# Altium PCB PCB1.PcbDoc
Units mm, origin at the board's own origin, x right, y up, seen from the top; angles counter-clockwise.
Board outline 40 x 25 mm, 4 copper layers (Top Layer 1, Top Layer, Bottom Layer, Bottom Layer 1), stack 1.502 mm thick; 33 components, 45 nets, 230 pads, 132 vias.
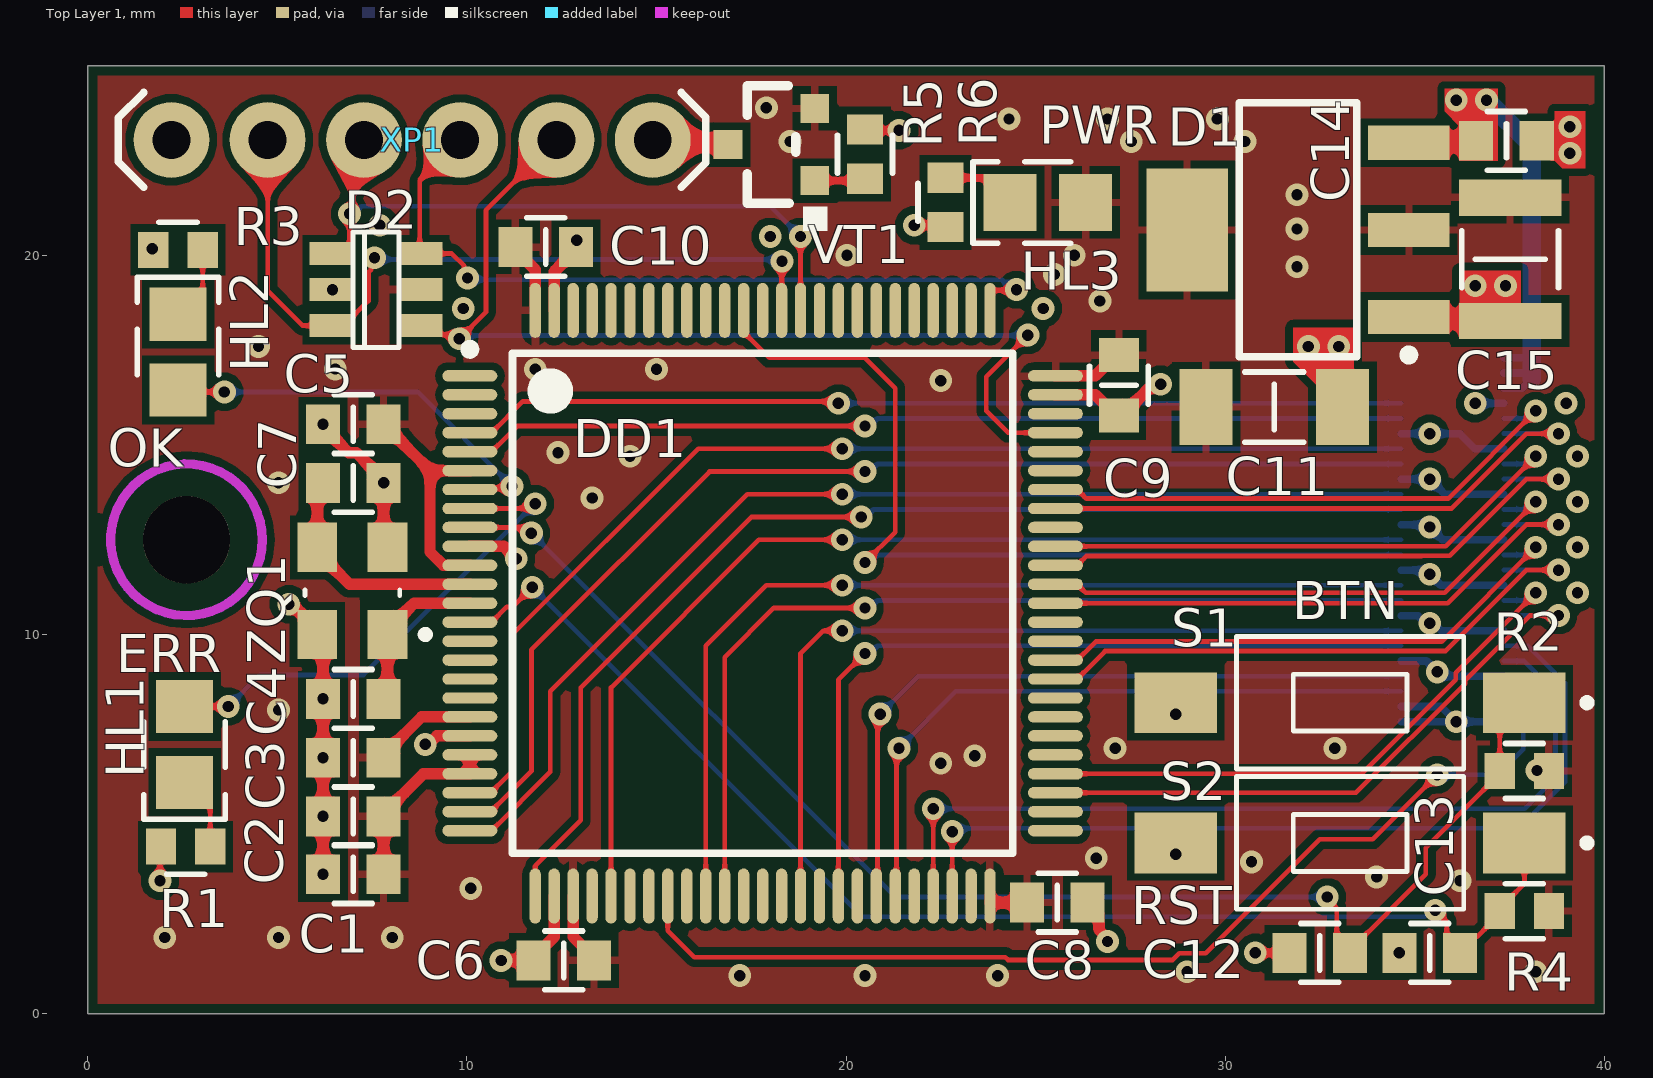
[diagram p0: Top Layer 1 view]
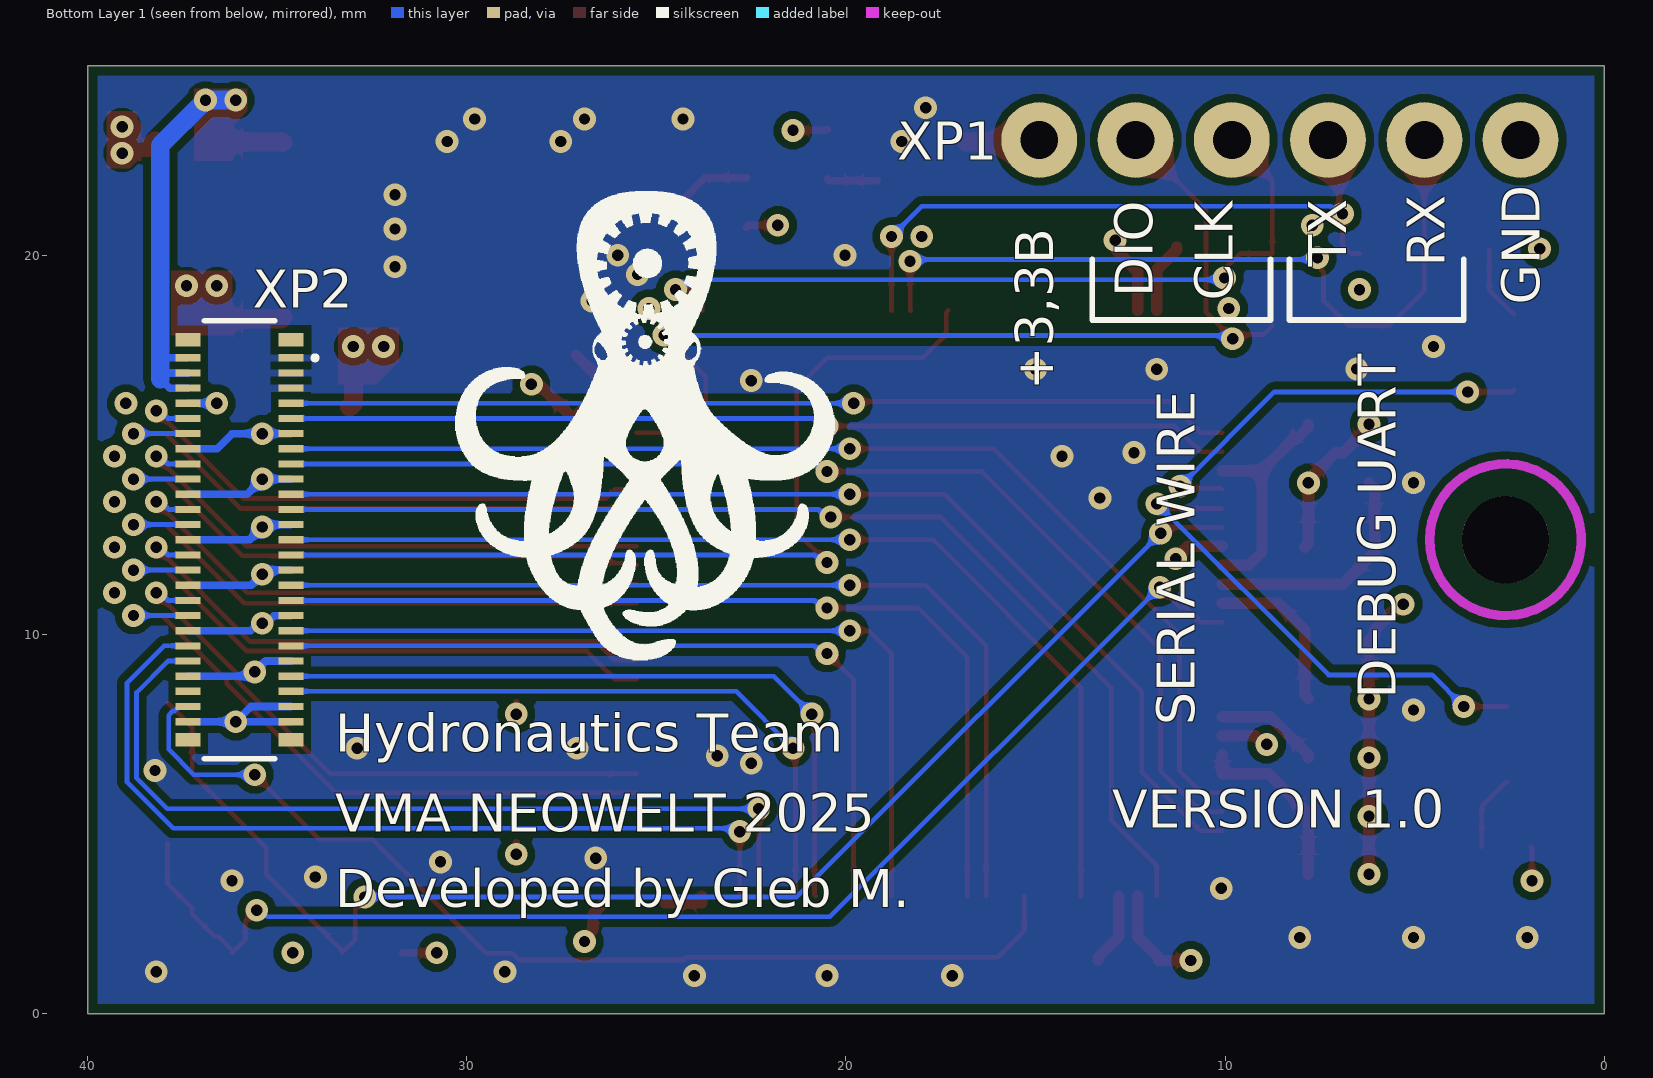
[diagram p1: Bottom Layer 1 view, seen from below]
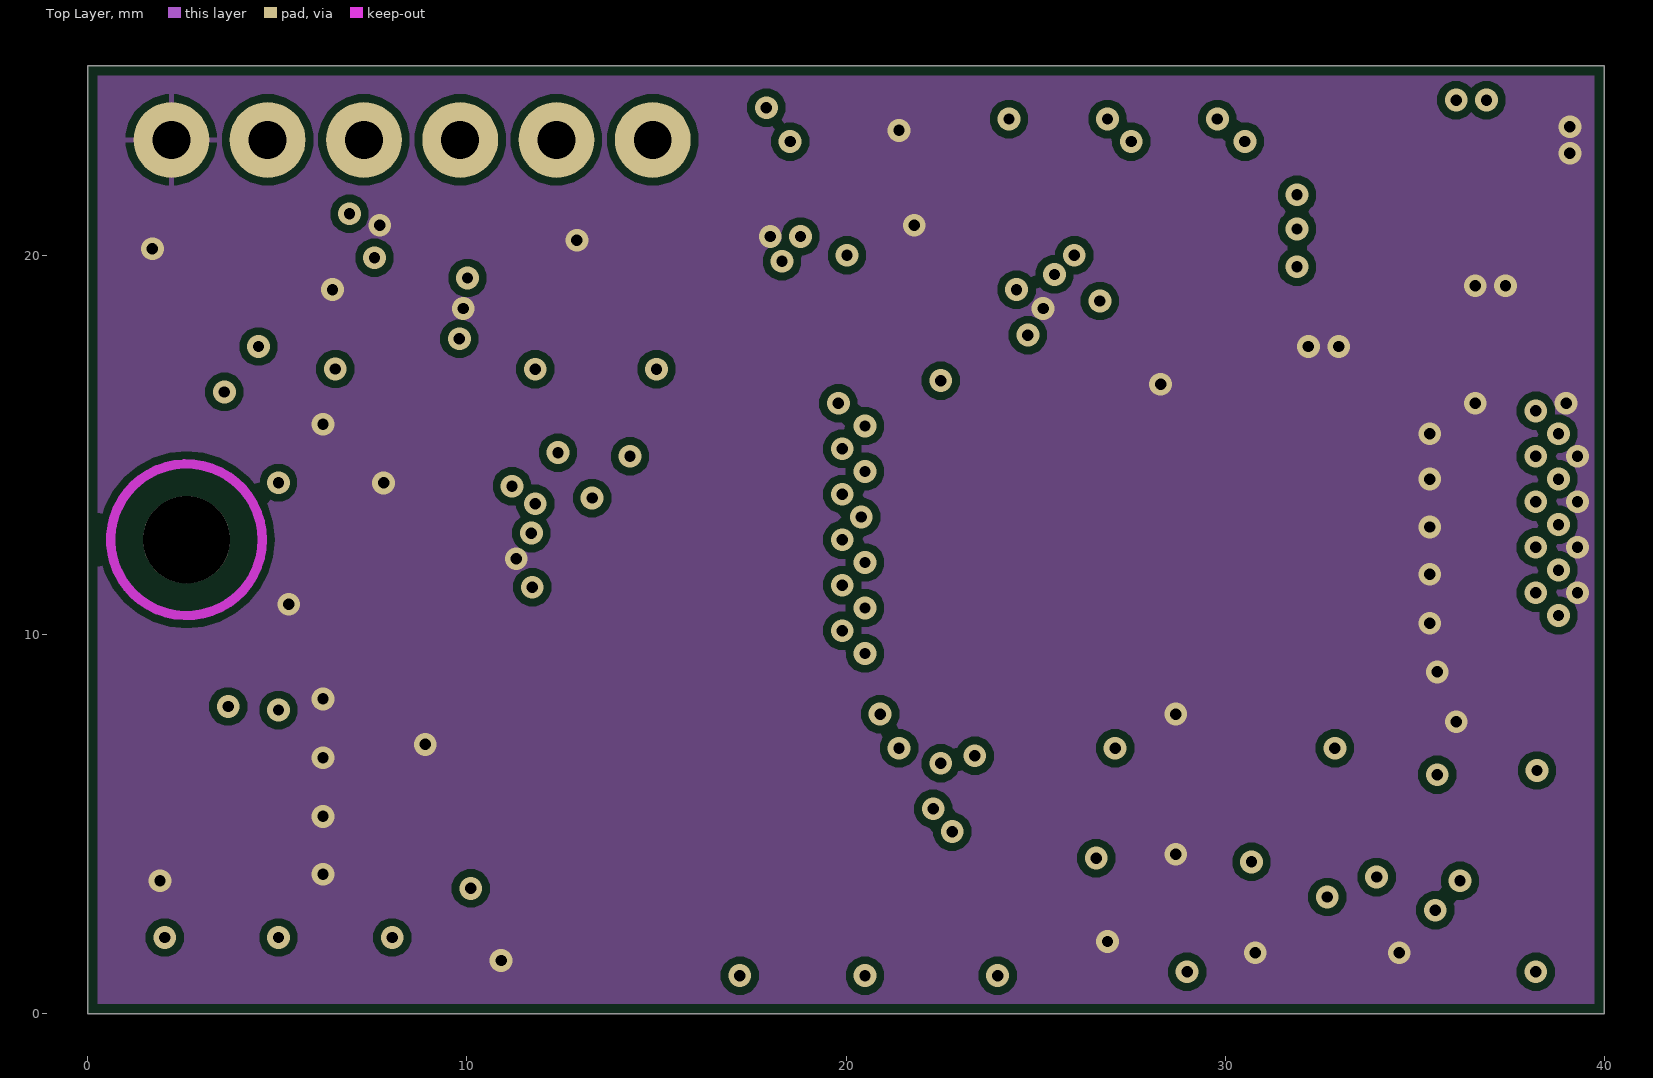
[diagram p2: Top Layer]
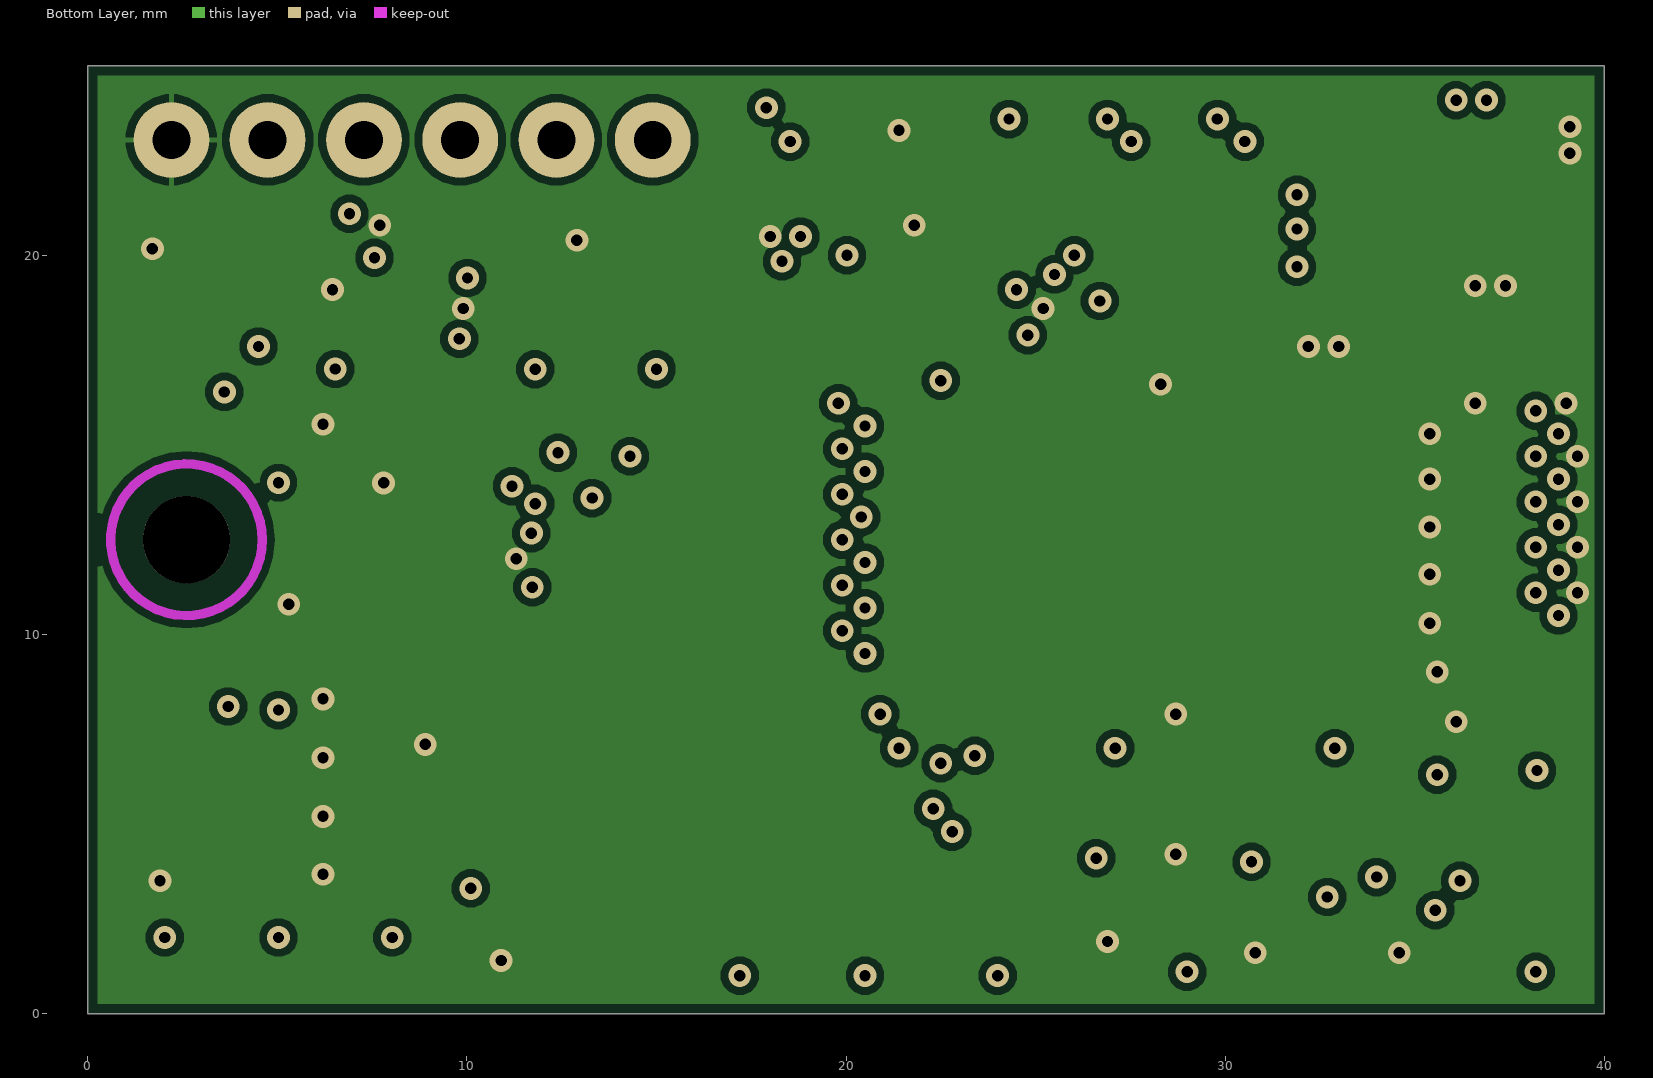
[diagram p3: Bottom Layer]

## Layer stack, top to bottom
Top Solder: solder mask 0.0102, Solder Resist, Dk 3.5
Top Layer 1: signal copper 0.018
Dielectric 2: prepreg 0.115, FR4, Dk 4.2
Top Layer: signal copper 0.018
Dielectric 1: core 1.2, FR4, Dk 4.6
Bottom Layer: signal copper 0.018
Dielectric 3: prepreg 0.115, FR4, Dk 4.2
Bottom Layer 1: signal copper 0.018
Bottom Solder: solder mask 0.0102, Solder Resist, Dk 3.5

## Board outline
0,0 40,0 40,25 0,25

## Design rules (kind name [scope] priority, off if disabled: settings)
AcuteAngle [All] p1: minimum=3.50000000000000E+0001 checktracksonly=FALSE
BoardOutlineClearance "BoardOutlineClearance 1" [All] p1: gap=0.25 ignorepadtopadclearanceinfootprint=FALSE except(0: Arc-SplitContinuation Track-SplitContinuation SMDPad-SplitContinuation THPad-SplitContinuation Via-SplitContinuation Fill-SplitContinuation Poly-SplitContinuation Region-SplitContinuation Text-SplitContinuation) // Milling
BoardOutlineClearance "BoardOutlineClearance 2" [All] p2: gap=0.4 ignorepadtopadclearanceinfootprint=FALSE except(0: Arc-SplitContinuation Track-SplitContinuation SMDPad-SplitContinuation THPad-SplitContinuation Via-SplitContinuation Fill-SplitContinuation Poly-SplitContinuation Region-SplitContinuation Text-SplitContinuation) // V-Cut
Clearance "Clearance-1 1/2 Oz" [All] p1: gap=0.125 ignorepadtopadclearanceinfootprint=FALSE except(0.2: Arc-Fill Arc-Poly Track-Fill Track-Poly SMDPad-SMDPad SMDPad-Fill SMDPad-Poly THPad-Fill THPad-Poly Via-Fill Via-Poly Fill-Fill Fill-Poly Poly-Poly Poly-Region Poly-Text; 0.25: Arc-Hole Track-Hole SMDPad-Hole THPad-Hole Via-Hole Fill-Hole Poly-Hole Region-Hole Text-Hole) // Standart
DiffPairsRouting "DiffPairsRouting 1/2 Oz" [All] p1: maxlimit=0.2 minlimit=0.125 mostfreqgap=0.125 toplayer_minwidth=0.125 toplayer_maxwidth=0.3 toplayer_prefwidth=0.2 midlayer1_minwidth=0.125 midlayer1_maxwidth=0.3 midlayer1_prefwidth=0.2 midlayer2_minwidth=0.125 midlayer2_maxwidth=0.3 midlayer2_prefwidth=0.2 bottomlayer_minwidth=0.125 bottomlayer_maxwidth=0.3 bottomlayer_prefwidth=0.2 maxuncoupledlength=12.7
HoleSize "Minimum HoleSize" [IsPad] p1: absolutevalues=TRUE maxlimit=5.9 minlimit=0.6 maxpercent=80.000 minpercent=20.000
HoleSize "Minimum HoleSize VIA 1" [IsVia] p2: absolutevalues=TRUE maxlimit=5.9 minlimit=0.3 maxpercent=80.000 minpercent=20.000 // Standart
HoleToHoleClearance Hole2HoleClearance [All] p1: gap=0.25 allowstackedmicrovias=FALSE
MinimumAnnularRing "Minimum AR VIA Standart" [IsVia] p1: minimumring=0.15
MinimumAnnularRing "Minimum AR PAD Standart" [IsPAD] p2: minimumring=0.2
MinimumSolderMaskSliver "SolderMask Bridge Standart" [All] p1: minsoldermaskwidth=0.149 // All Masks
PlaneClearance "PlaneClearance-1 1/2 Oz" [All] p1: clearance=0.2 // Standart
PlaneConnect "TermalConnect-1 1/2 Oz" [All] p1: pad.planeconnectstyle=Relief pad.reliefexpansion=0.2 pad.reliefentries=4 pad.reliefconductorwidth=0.2 pad.reliefairgap=0.2 via.planeconnectstyle=Direct via.reliefexpansion=0.2 via.reliefentries=4 via.reliefconductorwidth=0.2 via.reliefairgap=0.2 // Standart
PolygonConnect "PolygonConnect-1 1/2 Oz" [All] p1: thpad.connectstyle=Relief thpad.reliefconductorwidth=0.15 thpad.reliefentries=4 thpad.polygonreliefangle="90 Angle" thpad.airgapwidth=0.2 smdpad.connectstyle=Relief smdpad.reliefconductorwidth=0.2 smdpad.reliefentries=4 smdpad.polygonreliefangle="90 Angle" smdpad.airgapwidth=0.2 via.connectstyle=Direct via.reliefconductorwidth=0.254 via.reliefentries=4 via.polygonreliefangle="90 Angle" via.airgapwidth=0.254 // Standart
RoutingCorners [All] p1 off: cornerstyle=45-Degree minsetback=2.54 maxsetback=2.54
RoutingVias [All] p1: holewidth=0.3 width=0.6 viastyle="Through Hole" minholewidth=0.3 minwidth=0.6 maxholewidth=0.3 maxwidth=0.6
SilkToSilkClearance Silk2SilkClearance [All] p1 off: silktosilkclearance=0.15
SilkToSolderMaskClearance Silk2SolderMaskClearance [IsPad] p1 off: minsilkscreentomaskgap=0.15 clearancetoexposedcopper=TRUE
SolderMaskExpansion [IsVia] p1: expansion=0.102 istentingtop=TRUE
SolderMaskExpansion "SolderMaskExpansion LDI" [All] p2: expansion=0.025 istentingtop=FALSE // Advance
SupplyNets "Schematic Supply Nets_2" [InNet('+5В')] p1: voltage=0.000
SupplyNets "Schematic Supply Nets_1" [InNet('GND')] p2: voltage=0.000
SupplyNets "Schematic Supply Nets" [InNet('+3,3В')] p3: voltage=0.000
UnRoutedNet [All] p1: checkbadconnections=TRUE
Width "Width 1/2 Oz" [All] p1: maxlimit=0.5 minlimit=0.125 preferedwidth=0.2 checkconnectedcopper=TRUE
20 further rules are at their usual default settings.

## Classes and differential pairs
net class TIM12_CH[1..2]: TIM12_CH1 TIM12_CH2
net class TIM9_CH[1..2]: TIM9_CH1 TIM9_CH2
net class TIM8_CH[1..4]: TIM8_CH1 TIM8_CH2 TIM8_CH3 TIM8_CH4
net class TIM5_CH[1..4]: TIM5_CH1 TIM5_CH2 TIM5_CH3 TIM5_CH4
net class TIM3_CH[3..4]: TIM3_CH3 TIM3_CH4
net class TIM4_CH[1..2]: TIM4_CH1 TIM4_CH2
net class TIM2_CH[1..4]: TIM2_CH1 TIM2_CH2 TIM2_CH3 TIM2_CH4
net class TIM1_CH[1..4]: TIM1_CH1 TIM1_CH2 TIM1_CH3 TIM1_CH4
component class Connectors: 2 C14 C15 D1 D2 HL3 R5 R6 VT1 XP1 XP2
component class MCU: 2 C1 C2 C3 C4 C5 C6 C7 C8 C9 C10 C11 C12 C13 DD1 HL1 HL2 R1 R2 R3 R4 S1 S2 ZQ1

## Components (designator, comment, footprint, x,y, rotation, side; value= is the part's Value field where it differs from the comment)
C1 "Capacitor" 0603C 7,3.675 r0 top value="1 мк"
C2 "Capacitor" 0603C 7,5.2 r0 top value="0,1 мк"
C3 "Capacitor" 0603C 7,6.75 r0 top value="0,1 мк"
C4 "Capacitor" 0603C 7,8.3 r0 top value="12 п"
C5 "Capacitor" 0603C 7,15.55 r0 top value="0,1 мк"
C6 "Capacitor" 0603C 12.55,1.4 r0 top value="0,1 мк"
C7 "Capacitor" 0603C 7,14 r180 top value="12 п"
C8 "Capacitor" 0603C 25.575,2.925 r180 top value="0,1 мк"
C9 "Capacitor" 0603C 27.2,16.575 r90 top value="0,1 мк"
C10 "Capacitor" 0603C 12.075,20.225 r180 top value="0,1 мк"
C11 "Capacitor" 1206C 31.3,16 r180 top value="4,7 мк"
C12 "Capacitor" 0603C 32.5,1.6 r0 top value="0,1 мк"
C13 "Capacitor" 0603C 35.4,1.6 r0 top value="0,1 мк"
C14 "Capacitor" 0603C 37.425,23.025 r180 top value="0,1 мк"
C15 "Capacitor" 1210C 37.525,19.9 r90 top value="10 мк"
D1 "LD1117S33CTR" SOT223 31.925,20.675 r180 top
D2 "USBLC6-4" SOT23-6 7.6,19.1 r270 top
DD1 "STM32F407VGT6" LQFP100 17.8,10.825 r0 top
HL1 "LED" 0805D 2.55,7.1 r270 top
HL2 "LED" 0805D 2.375,17.45 r90 top
HL3 "LED" 0805D 25.325,21.4 r180 top
R1 "Resistor" 0603R 2.575,4.4 r0 top value="1,0 к"
R2 "Resistor" 0603R 37.9,6.4 r0 top value="10 к"
R3 "Resistor" 0603R 2.375,20.15 r0 top value="1,0 к"
R4 "Resistor" 0603R 37.9,2.7 r0 top value="10 к"
R5 "Resistor" 0603R 20.5,22.675 r270 top value="10 к"
R6 "Resistor" 0603R 22.625,21.4 r90 top value="1,0 к"
S1 "Tact_button" Button_SMD_10mm 33.3,8.2 r180 top
S2 "Tact_button" Button_SMD_10mm 33.3,4.5 r180 top
VT1 "AO3401A" SOT23-3 19.175,21.975 r180 top
XP1 "PLS-6" PLS6 14.9,23.05 r270 top
XP2 "DF40C-50DP" DF40C-50DP 36,12.5 r270 bottom
ZQ1 "XTAL_GND" QSMD3.2x2.5 7.9,10 r180 top value="8 МГц"

## Footprints (in the part's own frame and the unit in brackets; to place one, negate y for a bottom-side part, rotate by r counter-clockwise, add the part's x,y. Pads: shape width x height; smd on the part's side, far side on the other; paste and mask are expansions set on the pad)
0603C [mm] "Chip Resistor, 2-Leads, Body 1,40x0,80mm, IPC Medium Density"
  rect 0.9x1.05 smd: 1(-0.8,0) 2(0.8,0)
  silkscreen extent -0.5,-0.77 0.5,0.77, body extent -0.85,-0.45 0.85,0.45, height 0.9
0603R [mm] "Chip Resistor, 2-Leads, Body 1.60x0.85mm, IPC Medium Density"
  rect 0.8x0.95 smd: 1(-0.65,0) 2(0.65,0)
  silkscreen extent -0.5,-0.72 0.5,0.72, body extent -0.87,-0.47 0.88,0.48, height 0.9
0805D [mm]
  rect 1.4x1.5 smd: 1(-1,0) 2(1,0)
  silkscreen extent -0.6,-1.07 1.97,1.07, body extent -1.07,-0.7 1.07,0.7, height 0.7
1206C [mm]
  rect 1.4x2 smd paste+0: 1(-1.8,0) 2(1.8,0)
  silkscreen extent -0.77,-0.92 0.77,0.92, body extent -1.6,-0.74 1.6,0.86, height 1.59
1210C [mm]
  rect 0.954x2.706 smd paste+0: 1(-1.625,0) 2(1.625,0)
  silkscreen extent -0.75,-1.28 0.75,1.28, body extent -2.35,-1.6 2.35,1.6, height 0.25
Button_SMD_10mm [mm]
  rect 2.18x1.6 smd: 1(-4.6,0) 2(4.6,0)
  silkscreen extent -6.35,-1.75 3,1.75, body extent -3.4,-1.75 3.4,1.75, height 5.2
DF40C-50DP [mm]
  rect 0.19x0.66 smd: 1(-4.8,1.355) 2(-4.8,-1.355) 3(-4.4,1.355) 4(-4.4,-1.355) 5(-4,1.355) 6(-4,-1.355) 7(-3.6,1.355) 8(-3.6,-1.355) 9(-3.2,1.355) 10(-3.2,-1.355) 11(-2.8,1.355) 12(-2.8,-1.355) 13(-2.4,1.355) 14(-2.4,-1.355) 15(-2,1.355) 16(-2,-1.355) 17(-1.6,1.355) 18(-1.6,-1.355) 19(-1.2,1.355) 20(-1.2,-1.355) 21(-0.8,1.355) 22(-0.8,-1.355) 23(-0.4,1.355) 24(-0.4,-1.355) 25(0,1.355) 26(0,-1.355) 27(0.4,1.355) 28(0.4,-1.355) 29(0.8,1.355) 30(0.8,-1.355) 31(1.2,1.355) 32(1.2,-1.355) 33(1.6,1.355) 34(1.6,-1.355) 35(2,1.355) 36(2,-1.355) 37(2.4,1.355) 38(2.4,-1.355) 39(2.8,1.355) 40(2.8,-1.355) 41(3.2,1.355) 42(3.2,-1.355) 43(3.6,1.355) 44(3.6,-1.355) 45(4,1.355) 46(4,-1.355) 47(4.4,1.355) 48(4.4,-1.355) 49(4.8,1.355) 50(4.8,-1.355)
  rect 0.35x0.66 smd: M1(-5.28,1.355) M2(5.28,1.355) M3(5.28,-1.355) M4(-5.28,-1.355)
  silkscreen extent -5.77,-0.92 5.77,2.05, body extent -5.76,-1.49 5.76,1.49, height 1.14
LQFP100 [mm] "TSQFP, 100-Leads, Body 14,00x14,00mm, Pitch 0,50mm, IPC Medium Density"
  oval 1.45x0.3 smd: 1(-7.725,6) 2(-7.725,5.5) 3(-7.725,5) 4(-7.725,4.5) 5(-7.725,4) 6(-7.725,3.5) 7(-7.725,3) 8(-7.725,2.5) 9(-7.725,2) 10(-7.725,1.5) 11(-7.725,1) 12(-7.725,0.5) 13(-7.725,0) 14(-7.725,-0.5) 15(-7.725,-1) 16(-7.725,-1.5) 17(-7.725,-2) 18(-7.725,-2.5) 19(-7.725,-3) 20(-7.725,-3.5) 21(-7.725,-4) 22(-7.725,-4.5) 23(-7.725,-5) 24(-7.725,-5.5) 25(-7.725,-6) 51(7.725,-6) 52(7.725,-5.5) 53(7.725,-5) 54(7.725,-4.5) 55(7.725,-4) 56(7.725,-3.5) 57(7.725,-3) 58(7.725,-2.5) 59(7.725,-2) 60(7.725,-1.5) 61(7.725,-1) 62(7.725,-0.5) 63(7.725,0) 64(7.725,0.5) 65(7.725,1) 66(7.725,1.5) 67(7.725,2) 68(7.725,2.5) 69(7.725,3) 70(7.725,3.5) 71(7.725,4) 72(7.725,4.5) 73(7.725,5) 74(7.725,5.5) 75(7.725,6)
  oval 0.3x1.45 smd: 26(-6,-7.725) 27(-5.5,-7.725) 28(-5,-7.725) 29(-4.5,-7.725) 30(-4,-7.725) 31(-3.5,-7.725) 32(-3,-7.725) 33(-2.5,-7.725) 34(-2,-7.725) 35(-1.5,-7.725) 36(-1,-7.725) 37(-0.5,-7.725) 38(0,-7.725) 39(0.5,-7.725) 40(1,-7.725) 41(1.5,-7.725) 42(2,-7.725) 43(2.5,-7.725) 44(3,-7.725) 45(3.5,-7.725) 46(4,-7.725) 47(4.5,-7.725) 48(5,-7.725) 49(5.5,-7.725) 50(6,-7.725) 76(6,7.725) 77(5.5,7.725) 78(5,7.725) 79(4.5,7.725) 80(4,7.725) 81(3.5,7.725) 82(3,7.725) 83(2.5,7.725) 84(2,7.725) 85(1.5,7.725) 86(1,7.725) 87(0.5,7.725) 88(0,7.725) 89(-0.5,7.725) 90(-1,7.725) 91(-1.5,7.725) 92(-2,7.725) 93(-2.5,7.725) 94(-3,7.725) 95(-3.5,7.725) 96(-4,7.725) 97(-4.5,7.725) 98(-5,7.725) 99(-5.5,7.725) 100(-6,7.725)
  silkscreen extent -7.85,-6.6 6.6,6.82, body extent -8,-8 8,8, height 1.6
PLS6 [mm]
  round 2 hole 1: 1(0,0) 2(0,-2.54) 3(0,-5.08) 4(0,-7.62) 5(0,-10.16) 6(0,-12.7)
  silkscreen extent -1.25,-14.1 1.25,1.4, body extent -1.27,-13.97 1.27,1.27, height 8.44
QSMD3.2x2.5 [mm] "Кварцевый резонатор"
  rect 1.05x1.3 smd: 1(0,0) 2(1.85,-2.3) 3(0,-2.3) 3(1.85,0)
  silkscreen extent -1.1,-1.18 2.18,0.1, body extent -0.32,-2.75 2.18,0.45, height 0.8
SOT23-3 [mil]
  rect 30x30 smd: 1(0,0) 2(0,-75) 3(90,-37.5)
  silkscreen extent -13,-98 70,52, body extent -4,-97 94,21, height 41
SOT23-6 [mm]
  rect 0.6x1.2 smd: 1(-0.95,-1.15) 2(0,-1.15) 3(0.95,-1.15) 4(0.95,1.15) 5(0,1.15) 6(-0.95,1.15)
  silkscreen extent -1.52,-0.61 1.52,0.61, body extent -1.46,-1.4 1.46,1.4, height 1.4
SOT223 [mm] "SOT223, ld1117"
  rect 2.15x0.9 smd: 1(-2.925,2.3) 2(-2.925,0) 3(-2.925,-2.3)
  rect 2.15x3.25 smd: 2(2.925,0)
  silkscreen extent -3.05,-3.35 1.55,3.42, body extent -3.56,-3.3 3.51,3.2, height 1.6

## Part data
C1: library part Capacitor_1u_10_50V_X7R_0603C, "Конденсатор", Capacity (nF)=1000, Dielectric=X7R, Tolerance=0,1, Voltage (V)=50, Library Path2=Schematic\Capacitor.SchLib, Part Number=Capacitor_1u_10_50V_X7R_0603C
C2 C3 C5 C6 C8 C9 C10 C12 C13 C14: library part Capacitor_0,1u_10_50V_X7R_0603C, "Конденсатор", Capacity (nF)=100, Dielectric=X7R, Tolerance=0,1, Voltage (V)=50, Library Path2=Schematic\Capacitor.SchLib, Part Number=Capacitor_0,1u_10_50V_X7R_0603C
C4 C7: library part "0,1 мк", "Конденсатор 12п", Part Number=Capacitor
C11: library part Capacitor_4,7u_10_50V_X7R_1206C, "Конденсатор", Capacity (nF)=4700, Dielectric=X7R, Tolerance=0,1, Voltage (V)=50, Library Path2=Schematic\Capacitor.SchLib, Part Number=Capacitor_4,7u_10_50V_X7R_1206C
C15: library part Capacitor_10u_10_35V_X7R_1210C, "Конденсатор", Capacity (nF)=10000, Dielectric=X7R, Tolerance=0,1, Voltage (V)=35, Library Path2=Schematic\Capacitor.SchLib, Part Number=Capacitor_10u_10_35V_X7R_1210C
D1: "Линейный стабилизатор напряжения", Part Number=LD1117S33CTR
D2: "Сборка защитных диодов для USB", ComponentLink1Description=Shop, ComponentLink1URL=https://www.chipdip.ru/product0/8001780508, Part Number=USBLC6-4
DD1: "Микроконтроллер", Part Number=STM32F407VGT6
HL1 HL3: "Светодиод", Color=Красный, Part Number=LED
HL2: "Светодиод", Color=Зеленый, Part Number=LED
R1 R3 R6: library part Resistor_1.0k_1_0603, "Резистор номиналом 1,0 кОм и точностью 1%", Tolerance=1%, Part Number=Resistor_1.0k_1_0603
R2 R4 R5: library part Resistor_10k_1_0603, "Резистор номиналом 10 кОм и точностью 1%", Tolerance=1%, Part Number=Resistor_10k_1_0603
S1 S2: "Тактовая кнопка", Part Number=Tact_button
VT1: "P-канальный MOSFET", Part Number=AO3401A
XP1: "Гребенка 6 пинов", Value1=+3,3В, Value2=SWDIO, Value3=SWCLOCK, Value4=UART_TX, Value5=UART_RX, Value6=GND, Part Number=PLS-6, System=Connector
XP2: "Разъем плата-плата 50 пинов, мама, шаг 0.4мм", Value1={Value}, Part Number=DF40C-50DP, System=Connector, Value2={Value}, Value3={Value}, Value4={Value}, Value5={Value}, Value6={Value}, Value7={Value}, Value8={Value}, Value9={Value}, Value10={Value}, Value11={Value}, Value12={Value}, Value13={Value}, Value14={Value}, Value15={Value}, Value16={Value}, Value17={Value}, Value18={Value}, Value19={Value}, Value20={Value}, Value21={Value}, Value22={Value}, Value23={Value}, Value24={Value}, Value25={Value}
ZQ1: "Кварцевый резонатор с входом земли", Part Number=XTAL_GND

## Free pads (board coordinates)
  round 2.3 hole 2.3 unplated: 3(2.6,12.5)

## Via types
v1: diameter 0.6, hole 0.3, Top Layer 1 to Bottom Layer 1, tented both sides, 132 vias

## Nets (pads, with @x,y where several pads share a name; then routed paths per layer and width w, separated by ;. In a path a pad name is that pad's centre, name@x,y a point inside that pad or via, vN(x,y) a via of type N, cw(c..) or ccw(c..) an arc to the next point about the centre after c; other vN are vias at no path point)
+3,3В: C1.2 C2.2 C3.2 C5.2 C6.2 C8.2 C9.2 C10.2 C11.2 C15.2 D1.2 D2.5 DD1.6 DD1.11 DD1.19 DD1.21 DD1.22 DD1.28 DD1.50 DD1.75 DD1.100 HL3.1 R2.2 R4.2 VT1.2 XP2.1 XP2.3 XP2.5 | length 20.5
  Top Layer 1 w0.3: C1.2 C2.2 7.8,5.275 8.85,6.325 DD1.22 DD1.21 ; C3.2 7.8,6.825 8.8,7.825 DD1.19 ; C5.2 7.8,15.475 8.1,15.175 8.175,15.175 9.025,14.325 ; DD1.11 9.376,11.825 9.025,12.176 9.025,14.325 ; DD1.6 9.025,14.325 ; C10.2 11.275,20.15 11.8,19.625 DD1.100 ; DD1.28 12.8,2.025 13.35,1.475 C6.2 ; DD1.50 23.8,2.925 C8.2 ; DD1.75 26.575,16.825 C9.2@27.125,17.375
  other v1: 17.2,1 20.5,1 24,1 29,1.1 38.2,1.1 2.025,2.006 5.025,2.006 8.025,2.006 10.1,3.3 36.2,3.5 34,3.6 30.7,4 26.6,4.1 38.232,6.411 22.5,6.6 23.4,6.8 27.1,7 32.9,7 5.025,8.006 13.3,13.6 5.025,14.006 14.3,14.7 12.4,14.8 22.5,16.7 6.525,17.006 11.8,17 15,17 4.5,17.6 26.7,18.8 25.5,19.5 31.9,19.7 20.025,20.006 26.025,20.006 31.9,20.7 31.9,21.6 18.525,23.006 27.525,23.006 30.525,23.006 24.3,23.6 26.9,23.6 29.8,23.6 17.9,23.9
+5В: C14.2 D1.3 XP2.2 XP2.4 XP2.6 | length 12.8
  Top Layer 1 w0.5: D1.3 34.875,23 36.6,23 C14.2 C14.2@36.627,23.027
  Bottom Layer 1 w0.2: XP2.6 37.846,16.5 38.093,16.747 ; XP2.4 37.943,16.9 38.093,17.05 ; XP2.2 38.093,17.3
  Bottom Layer 1 w0.5: v1(36.1,24.1) v1(36.9,24.1) 38.093,22.907 38.093,17.3 38.093,17.05 38.093,16.747
ADC1_IN14: DD1.33 XP2.48 | length 27.6
  Top Layer 1 w0.125: DD1.33 15.3,2.188 16,1.488 24.202,1.488 24.277,1.412 28.623,1.412 28.798,1.588 29.488,1.588 32.5,4.6 33.9,4.6 v1(35.6,6.3)
  Bottom Layer 1 w0.125: v1(35.6,6.3) 37.205,6.3 37.873,6.967 37.873,7.873 37.763,7.983 37.707,7.983 37.623,8.068 37.387,8.068 XP2.48
BUTTON: C12.2 DD1.9 R2.1 S1.1 | length 36.9
  Top Layer 1 w0.125: DD1.9 11.442,12.825 11.592,12.675 v1(11.7,12.675) ; v1(32.7,3.075) 32.7,3.009 32.95,2.759 32.95,1.95 C12.2 33.3,1.675 35.3,3.675 35.3,4.375 37.25,6.325 37.25,7.55 S1.1
  Bottom Layer 1 w0.125: v1(11.7,12.675) 21.3,3.075 v1(32.7,3.075)
GND: C1.1 C2.1 C3.1 C4.1 C5.1 C6.1 C7.1 C8.1 C9.1 C10.1 C11.1 C12.1 C13.1 C14.1 C15.1 D1.1 D2.2 DD1.10 DD1.20 DD1.27 DD1.74 DD1.99 R1.1 R3.1 R5.1 R6.1 S1.2 S2.2 XP1.6 XP2.8 XP2.11 XP2.14 XP2.17 XP2.20 XP2.23 XP2.26 XP2.29 XP2.32 XP2.35 XP2.38 XP2.41 XP2.44 XP2.47 XP2.49 XP2.50 ZQ1.3 | length 56.4
  Top Layer 1 w0.125: v1(1.7,20.175) R3.1 ; v1(1.9,3.5) 1.9,4.375 R1.1
  Top Layer 1 w0.2: R5.1 20.525,23.3 v1(21.4,23.3) ; v1(21.8,20.8) 22.575,20.8 R6.1 ; v1(28.7,4.2) S2.2 ; v1(28.7,7.9) S1.2 ; v1(30.8,1.6) C12.1
  Top Layer 1 w0.3: v1(5.3,10.8) 5.375,10.8 6.05,10.125 6.05,10 6.2,9.85 v1(6.2,8.3) v1(6.2,6.75) v1(6.2,5.2) v1(6.2,3.675) ; C5.1@6.2,15.475 6.876,14.799 7.076,14.799 7.8,14.075 7.8,12.4 ZQ1.3@7.9,12.3 ; v1(8.9,7.1) 8.981,7.1 9.206,7.325 DD1.20 ; DD1.10 10.975,12.325 v1(11.3,12) ; v1(10.9,1.4) C6.1 11.75,1.475 12.3,2.025 DD1.27 ; DD1.99 12.3,19.575 ; C10.1 12.875,20.15 12.3,19.575 ; v1(12.9,20.4) 12.8,20.3 12.8,20.075 12.3,19.575 ; DD1.74 26.575,16.325 27.125,15.775 C9.1 27.275,15.775 28.043,16.543 28.243,16.543 v1(28.3,16.6) ; C8.1 26.675,2.625 26.675,2.206 26.9,1.981 v1(26.9,1.9)
  Top Layer 1 w0.5: v1(33,17.6) 33,16.1 C11.1 ; D1.1 34.9,18.325 37.475,18.325 C15.1 ; C14.1 38.402,22.848 38.925,22.848 39.073,22.7 v1(39.1,22.7)
  Bottom Layer 1 w0.2: XP2.49 v1(36.1,7.7) ; XP2.47 35.7,8.1 v1(36.1,7.7) ; XP2.41 35.312,9.3 v1(35.6,9.012) 35.708,9.012 35.821,8.9 XP2.44 ; XP2.35 35.092,10.5 35.292,10.3 v1(35.4,10.3) 35.508,10.3 35.708,10.1 XP2.38 ; XP2.29 35.179,11.7 35.292,11.587 v1(35.4,11.587) 35.687,11.3 XP2.32 ; XP2.23 34.65,12.895 35.342,12.895 v1(35.4,12.837) 35.737,12.5 XP2.26 ; XP2.17 v1(35.4,14.1) 35.8,13.7 XP2.20 ; XP2.11 v1(35.4,15.3) 36.2,15.3 36.595,14.905 37.35,14.905 XP2.14 ; v1(36.6,16.1) XP2.8 ; XP2.50 v1(36.1,7.7)
  other v1: 34.6,1.6 39.3,11.1 39.3,12.3 39.3,13.5 7.8,14 39.3,14.7 6.2,15.55 39,16.1 32.2,17.6 9.9,18.6 25.2,18.6 6.45,19.1 36.6,19.2 37.4,19.2 18,20.5 7.7,20.8 39.1,23.4
LED_ERROR: DD1.8 HL1.1 | length 13.2
  Top Layer 1 w0.125: HL1.1@2.55,8.1 v1(3.7,8.1) ; DD1.8 11.546,13.325 11.671,13.45 v1(11.8,13.45)
  Bottom Layer 1 w0.125: v1(3.7,8.1) 4.532,8.932 7.268,8.932 11.786,13.45 v1(11.8,13.45)
LED_OK: DD1.7 HL2.1 | length 11
  Top Layer 1 w0.125: HL2.1 2.425,16.4 v1(3.6,16.4) ; DD1.7 10.108,13.858 11.133,13.858 v1(11.187,13.913)
  Bottom Layer 1 w0.125: v1(3.6,16.4) 8.7,16.4 v1(11.187,13.913)
NetC4_2: C4.2 DD1.13 ZQ1.1 | length 4.3
  Top Layer 1 w0.3: C4.2 7.9,8.4 ZQ1.1 7.9,10.125 8.6,10.825 DD1.13
NetC7_2: C7.2 DD1.12 ZQ1.2 | length 6.3
  Top Layer 1 w0.3: C7.2 6.05,13.85 ZQ1.2 6.05,12.175 6.9,11.325 DD1.12
NetHL1_2: HL1.2 R1.2 | length 2
  Top Layer 1 w0.125: HL1.2 2.587,6.1 3.225,5.463 R1.2
NetHL2_2: HL2.2 R3.2 | length 2
  Top Layer 1 w0.125: HL2.2 2.387,18.45 3.025,19.087 R3.2
NetHL3_2: HL3.2 R6.2 | length 2
  Top Layer 1 w0.2: R6.2 23.725,22.05 24.325,21.45 HL3.2
NetR5_2: R5.2 VT1.1 | length 1.3
  Top Layer 1 w0.2: VT1.1 20.45,21.975 R5.2
NetVT1_3: VT1.3 XP1.1 | length 2
  Top Layer 1 w0.3: XP1.1 XP1.1@14.961,22.989 ; VT1.3@16.828,22.989 VT1.3
  Top Layer 1 w0.5: XP1.1@14.961,22.989 VT1.3@16.828,22.989
RESET: C13.2 DD1.14 R4.1 S2.1 | length 34.6
  Top Layer 1 w0.125: DD1.14 10.65,10.325 11.052,10.727 11.202,10.727 v1(11.725,11.25) ; v1(35.55,2.725) 35.85,2.425 35.85,1.95 C13.2 36.2,1.675 36.55,2.025 36.65,2.025 37.25,2.625 37.25,2.775 37.9,3.425 S2.1
  Bottom Layer 1 w0.125: v1(11.725,11.25) 20.425,2.55 35.267,2.55 35.442,2.725 v1(35.55,2.725)
SWCLOCK: D2.6 DD1.76 XP1.3 | length 20.9
  Top Layer 1 w0.125: XP1.3 8.75,21.98 8.75,20.1 D2.6 9.6,20.05 9.922,19.728 9.922,19.497 v1(10.012,19.406) ; DD1.76 23.8,19 23.881,19.081 24.481,19.081 v1(24.5,19.1)
  Bottom Layer 1 w0.125: v1(10.012,19.406) 10.06,19.358 24.113,19.358 24.371,19.1 v1(24.5,19.1)
SWDIO: D2.4 DD1.72 XP1.2 | length 27.1
  Top Layer 1 w0.125: D2.4 8.987,17.913 9.559,17.913 9.671,17.8 v1(9.8,17.8) 10.5,18.5 10.5,21.19 XP1.2 ; v1(24.8,17.9) 23.7,16.8 23.7,15.9 24.275,15.325 DD1.72
  Bottom Layer 1 w0.125: v1(9.8,17.8) 9.888,17.888 24.788,17.888 v1(24.8,17.9)
TIM1_CH1: DD1.40 XP2.37 | length 22.5
  Top Layer 1 w0.125: DD1.40 18.8,9.5 19.4,10.1 v1(19.9,10.1)
  Bottom Layer 1 w0.125: v1(19.9,10.1) XP2.37
TIM1_CH2: DD1.42 XP2.39 | length 20.9
  Top Layer 1 w0.125: DD1.42 19.8,8.8 v1(20.5,9.5)
  Bottom Layer 1 w0.125: v1(20.5,9.5) 20.629,9.5 20.829,9.7 XP2.39
TIM1_CH3: DD1.44 XP2.43 | length 19
  Top Layer 1 w0.125: DD1.44 20.833,3.133 20.833,7.833 v1(20.9,7.9)
  Bottom Layer 1 w0.125: v1(20.9,7.9) 21.9,8.9 XP2.43
TIM1_CH4: DD1.45 XP2.45 | length 17.8
  Top Layer 1 w0.125: DD1.45 21.333,3.133 21.333,6.933 v1(21.4,7)
  Bottom Layer 1 w0.125: v1(21.4,7) 22.9,8.5 XP2.45
TIM2_CH1: DD1.30 XP2.25 | length 28
  Top Layer 1 w0.125: DD1.30 13.8,8.6 17.7,12.5 v1(19.9,12.5)
  Bottom Layer 1 w0.125: v1(19.9,12.5) XP2.25
TIM2_CH2: DD1.89 XP2.27 | length 24.3
  Top Layer 1 w0.125: DD1.89 17.357,18.493 17.357,17.918 17.975,17.3 20.5,17.3 21.3,16.5 21.3,12.7 v1(20.5,11.9)
  Bottom Layer 1 w0.125: v1(20.5,11.9) 20.629,11.9 20.829,12.1 XP2.27
TIM2_CH3: DD1.47 XP2.42 | length 23
  Top Layer 1 w0.125: DD1.47 v1(22.3,5.4)
  Bottom Layer 1 w0.125: v1(22.3,5.4) 37.911,5.4 38.72,6.209 38.72,8.47 37.889,9.3 XP2.42
TIM2_CH4: DD1.48 XP2.40 | length 23
  Top Layer 1 w0.125: DD1.48 v1(22.8,4.8)
  Bottom Layer 1 w0.125: v1(22.8,4.8) 22.888,4.888 37.753,4.888 38.97,6.105 38.97,8.725 37.994,9.7 XP2.40
TIM3_CH3: DD1.35 XP2.31 | length 25.6
  Top Layer 1 w0.125: DD1.35 16.3,9.7 17.9,11.3 v1(19.9,11.3)
  Bottom Layer 1 w0.125: v1(19.9,11.3) XP2.31
TIM3_CH4: DD1.36 XP2.33 | length 24.8
  Top Layer 1 w0.125: DD1.36 16.8,9.4 18.1,10.7 v1(20.5,10.7)
  Bottom Layer 1 w0.125: v1(20.5,10.7) 20.629,10.7 20.829,10.9 XP2.33
TIM4_CH1: DD1.59 XP2.30 | length 15.9
  Top Layer 1 w0.125: DD1.59 26.096,8.825 26.834,9.562 35.816,9.562 37.954,11.7 v1(38.8,11.7)
  Bottom Layer 1 w0.125: XP2.30 v1(38.8,11.7)
TIM4_CH2: DD1.60 XP2.28 | length 14.8
  Top Layer 1 w0.125: DD1.60 26.1,9.325 26.587,9.812 35.712,9.812 v1(38.2,12.3)
  Bottom Layer 1 w0.125: XP2.28 37.887,12.1 38.087,12.3 v1(38.2,12.3)
TIM5_CH1: DD1.23 XP2.13 | length 30.4
  Top Layer 1 w0.125: DD1.23 10.627,5.825 11.2,6.398 11.2,10 16.1,14.9 v1(19.9,14.9)
  Bottom Layer 1 w0.125: v1(19.9,14.9) XP2.13
TIM5_CH2: DD1.24 XP2.15 | length 30.2
  Top Layer 1 w0.125: DD1.24 10.627,5.325 11.7,6.398 11.7,9.6 16.4,14.3 v1(20.5,14.3)
  Bottom Layer 1 w0.125: v1(20.5,14.3) 20.629,14.3 20.829,14.5 XP2.15
TIM5_CH3: DD1.25 XP2.19 | length 29.5
  Top Layer 1 w0.125: DD1.25 10.65,4.825 12.2,6.375 12.2,8.5 17.4,13.7 v1(19.9,13.7)
  Bottom Layer 1 w0.125: v1(19.9,13.7) XP2.19
TIM5_CH4: DD1.26 XP2.21 | length 29.6
  Top Layer 1 w0.125: DD1.26 11.8,3.9 13,5.1 13,8.6 17.5,13.1 v1(20.4,13.1)
  Bottom Layer 1 w0.125: v1(20.4,13.1) 20.529,13.1 20.729,13.3 XP2.21
TIM8_CH1: DD1.63 XP2.24 | length 15.6
  Top Layer 1 w0.125: DD1.63 35.879,10.825 37.954,12.9 v1(38.8,12.9)
  Bottom Layer 1 w0.125: XP2.24 v1(38.8,12.9)
TIM8_CH2: DD1.64 XP2.22 | length 14.7
  Top Layer 1 w0.125: DD1.64 26.1,11.325 26.325,11.1 35.8,11.1 v1(38.2,13.5)
  Bottom Layer 1 w0.125: XP2.22 37.621,13.3 37.623,13.301 37.873,13.301 38.071,13.5 v1(38.2,13.5)
TIM8_CH3: DD1.65 XP2.18 | length 15.7
  Top Layer 1 w0.125: DD1.65 25.582,11.882 26.157,11.882 26.345,12.07 35.193,12.07 35.198,12.075 35.929,12.075 37.954,14.1 v1(38.8,14.1)
  Bottom Layer 1 w0.125: XP2.18 v1(38.8,14.1)
TIM8_CH4: DD1.66 XP2.16 | length 14.6
  Top Layer 1 w0.125: DD1.66 35.825,12.325 v1(38.2,14.7)
  Bottom Layer 1 w0.125: XP2.16 37.887,14.5 38.087,14.7 v1(38.2,14.7)
TIM9_CH1: DD1.4 XP2.7 | length 24.9
  Top Layer 1 w0.125: DD1.4 10.65,15.325 11.475,16.15 19.75,16.15 v1(19.8,16.1)
  Bottom Layer 1 w0.125: v1(19.8,16.1) XP2.7
TIM9_CH2: DD1.5 XP2.9 | length 24.9
  Top Layer 1 w0.125: DD1.5 10.65,14.825 11.325,15.5 v1(20.5,15.5)
  Bottom Layer 1 w0.125: v1(20.5,15.5) 20.629,15.5 20.829,15.7 XP2.9
TIM12_CH1: DD1.53 XP2.36 | length 16.7
  Top Layer 1 w0.125: DD1.53 33.455,5.825 36.338,8.707 36.338,8.793 38.045,10.5 v1(38.8,10.5)
  Bottom Layer 1 w0.125: XP2.36 v1(38.8,10.5)
TIM12_CH2: DD1.54 XP2.34 | length 15.7
  Top Layer 1 w0.125: DD1.54 33.602,6.325 36.088,8.811 36.088,8.988 v1(38.2,11.1)
  Bottom Layer 1 w0.125: XP2.34 37.887,10.9 38.087,11.1 v1(38.2,11.1)
UART1_RX: DD1.69 XP2.10 | length 14.7
  Top Layer 1 w0.125: DD1.69 26.1,13.825 26.339,13.586 35.886,13.586 v1(38.2,15.9)
  Bottom Layer 1 w0.125: XP2.10 37.887,15.7 38.087,15.9 v1(38.2,15.9)
UART1_TX: DD1.68 XP2.12 | length 15.5
  Top Layer 1 w0.125: DD1.68 35.979,13.325 37.954,15.3 v1(38.8,15.3)
  Bottom Layer 1 w0.125: XP2.12 37.359,15.304 38.796,15.304 v1@38.8,15.309
UART2_RX: D2.3 DD1.87 XP1.5 | length 20.6
  Top Layer 1 w0.125: XP1.5 4.74,19.072 5.662,18.15 6.75,18.15 7.4,18.8 7.4,19.557 7.468,19.625 7.468,19.85 v1(7.559,19.941) ; DD1.87 18.306,18.556 18.306,19.84 v1(18.312,19.846)
  Bottom Layer 1 w0.125: v1(7.559,19.941) 7.607,19.893 18.265,19.893 v1(18.312,19.846)
UART2_TX: D2.1 DD1.86 XP1.4 | length 17.7
  Top Layer 1 w0.125: D2.1 6.663,20.05 6.9,20.287 v1(6.9,21.1) 6.991,21.191 6.991,22.761 XP1.4 ; DD1.86 v1(18.8,20.5)
  Bottom Layer 1 w0.125: v1(6.9,21.1) 7.013,21.1 7.213,21.3 18,21.3 v1(18.8,20.5)
pads on no net: DD1.1 DD1.2 DD1.3 DD1.15 DD1.16 DD1.17 DD1.18 DD1.29 DD1.31 DD1.32 DD1.34 DD1.37 DD1.38 DD1.39 DD1.41 DD1.43 DD1.46 DD1.49 DD1.51 DD1.52 DD1.55 DD1.56 DD1.57 DD1.58 DD1.61 DD1.62 DD1.67 DD1.70 DD1.71 DD1.73 DD1.77 DD1.78 DD1.79 DD1.80 DD1.81 DD1.82 DD1.83 DD1.84 DD1.85 DD1.88 DD1.90 DD1.91 DD1.92 DD1.93 DD1.94 DD1.95 DD1.96 DD1.97 DD1.98 XP2.46 XP2.M1 XP2.M2 XP2.M3 XP2.M4

## Polygon pours and split planes (outlines as drawn)
GND on Top Layer "GND_L02_P000" (solid, remove dead copper, pour order 0): 0,0 40,0 40,25 0,25
GND on Bottom Layer "GND_L03_P001" (solid, remove dead copper, pour order 1): 0,0 40,0 40,25 0,25
+3,3В on Top Layer 1 "+3,3В_L01_P002" (solid, remove dead copper, pour order 2): 0,0 40,0 40,25 0,25
+3,3В on Bottom Layer 1 "+3,3В_L04_P003" (solid, remove dead copper, pour order 3): 0,0 40,0 40,25 0,25

## Keep-outs
Keep-Out Layer:
  circle w0.25: c2.6,12.5 r2

## Other copper
Top Layer 1:
  region net GND: 32.4,16.6 31.8,17.2 31.8,18.1 33.4,18.1 33.4,16.6
  region net GND: 36.2,17.9 36.2,19.6 37.8,19.6 37.8,17.9
  region net GND: 38.7,22.5 38.9,22.3 39.5,22.3 39.5,23.8 38.7,23.8 38.7,23.6 38.6,23.5 38.6,22.5
  region net +5В: 36.2,23.4 35.8,23.8 35.8,24.4 37.2,24.4 37.2,22.5 36.2,22.5

## Silkscreen, mask and mechanical layers (free items; w line width, h text height)
Top Overlay:
  text "PWR" at 25.1,22.95 h1
  text "OK" at 0.525,14.425 h1
  text "BTN" at 31.775,10.4 h1
  text "ERR" at 0.75,9 h1
  text "RST" at 27.525,2.35 h1
Bottom Overlay:
  drawing of 10 lines, arcs and shapes, not listed
  text "RX" at 4.2,19.7 h1 r270
  text "TX" at 6.8,19.7 h1 r270
  text "DIO" at 11.9,18.9 h1 r270
  text "CLK" at 9.8,18.8 h1 r270
  text "GND" at 1.7,18.7 h1 r270
  text "+3,3B" at 14.533,16.45 h1 r270
  text "DEBUG UART" at 5.5,8.3 h1 r270
  text "SERIAL WIRE" at 10.8,7.6 h1 r270
  text "Hydronautics Team" at 33.475,6.908 h1
  text "VERSION 1.0" at 12.975,4.9 h1
  text "VMA NEOWELT 2025" at 33.475,4.8 h1
  text "Developed by Gleb M." at 33.475,2.808 h1